# Altium PCB LCD.PcbDoc
Units mil, origin at the board's own origin, x right, y up, seen from the top; angles counter-clockwise.
Board outline 8903 x 4000 mil, 2 copper layers (Top Layer, Bottom Layer); 37 components, 128 nets, 129 pads, 12 vias.
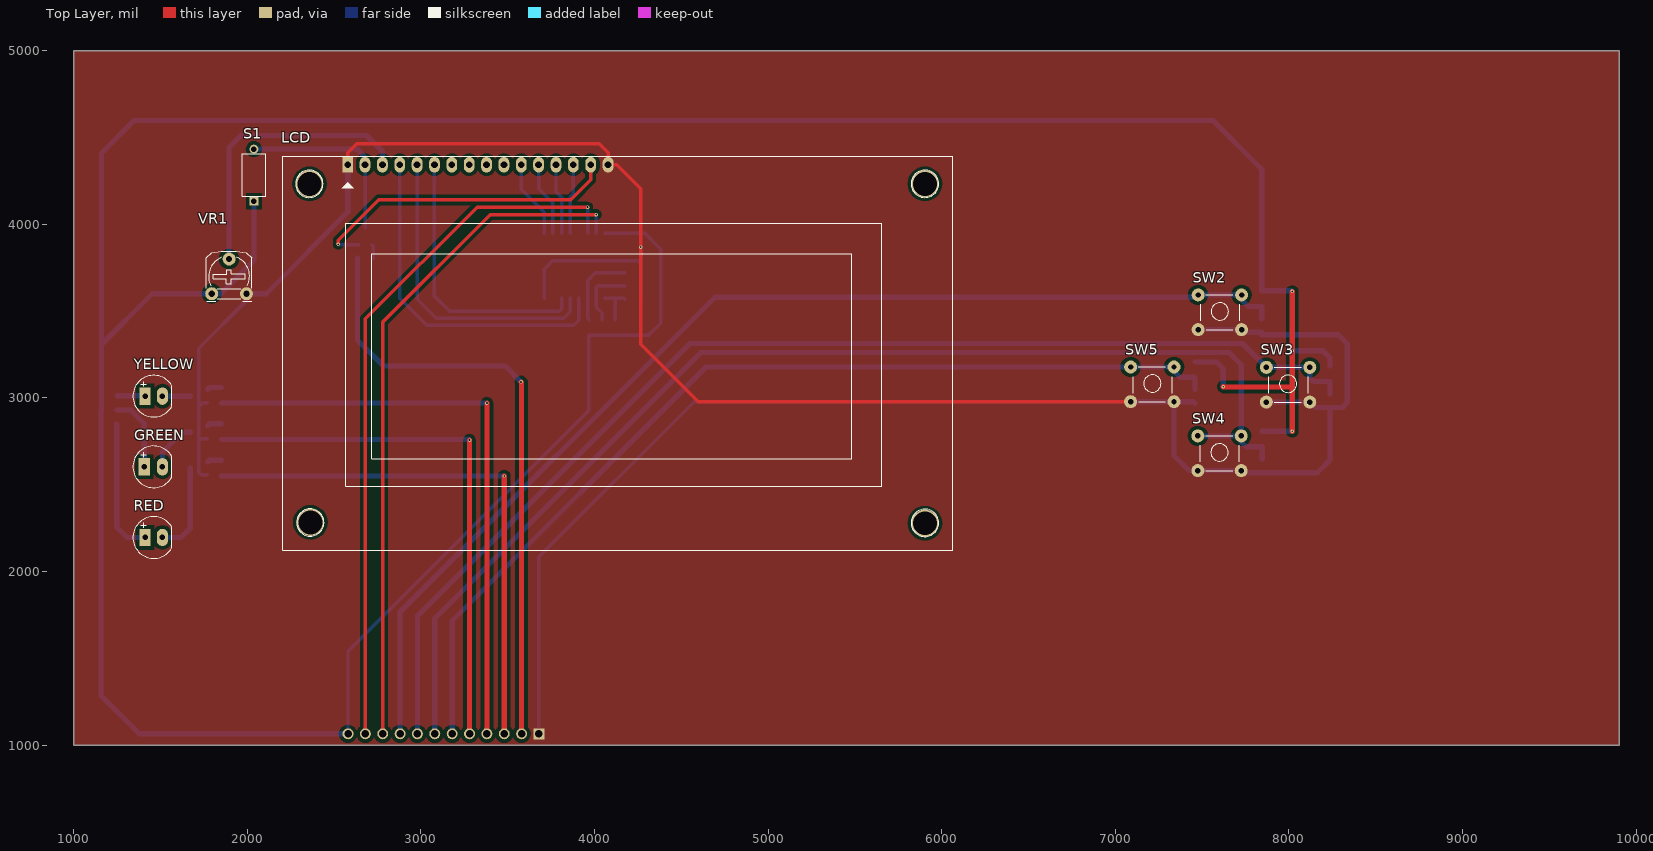
[diagram p0: Top Layer view]
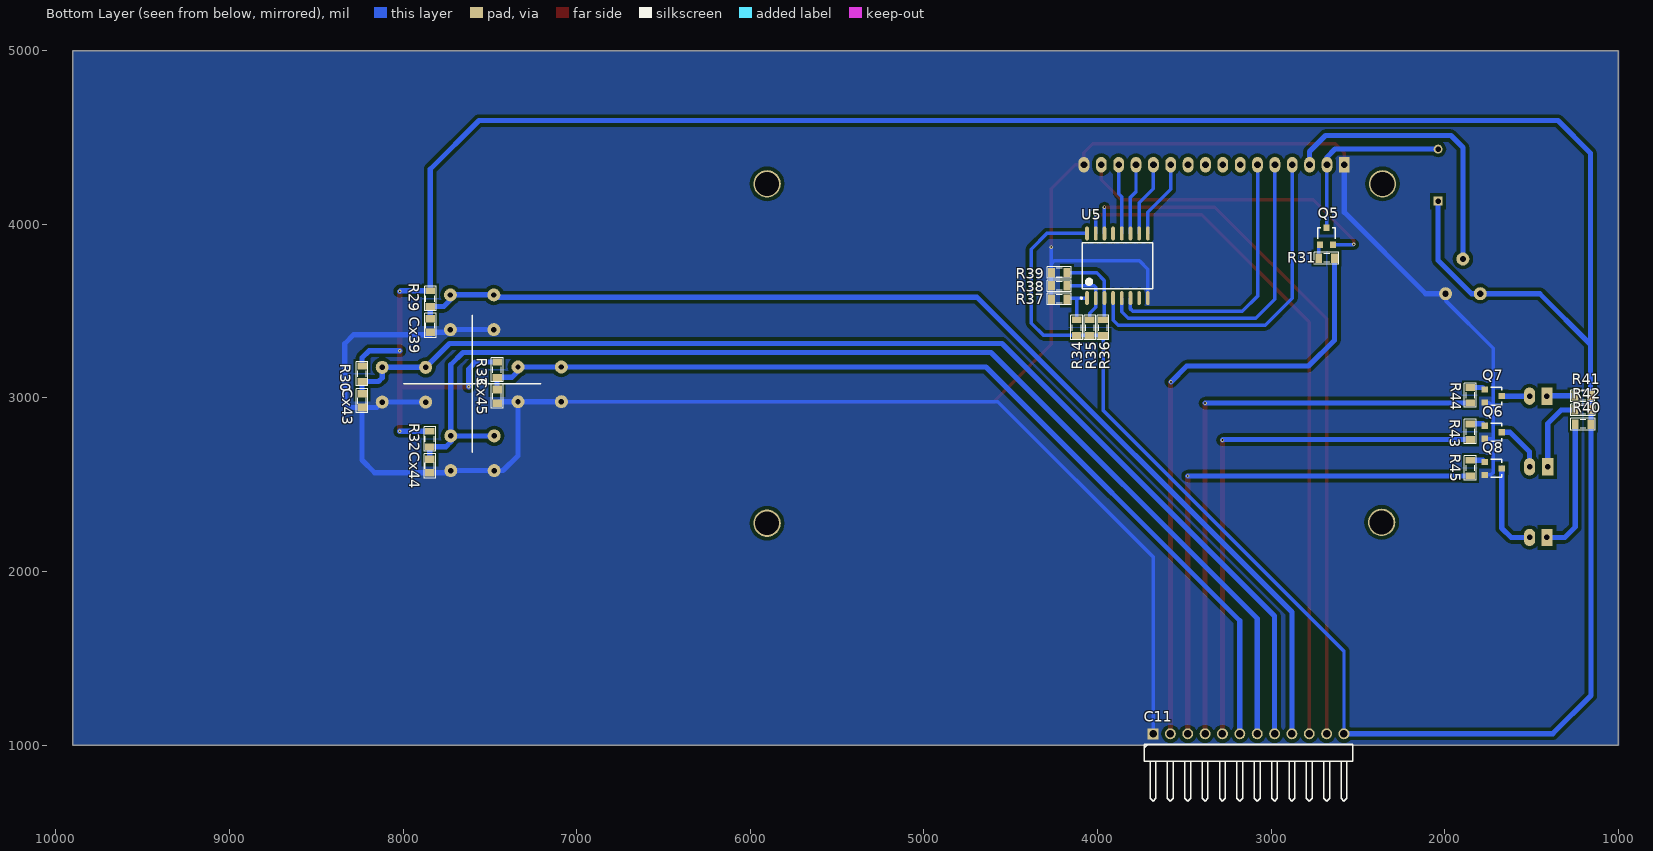
[diagram p1: Bottom Layer view, seen from below]
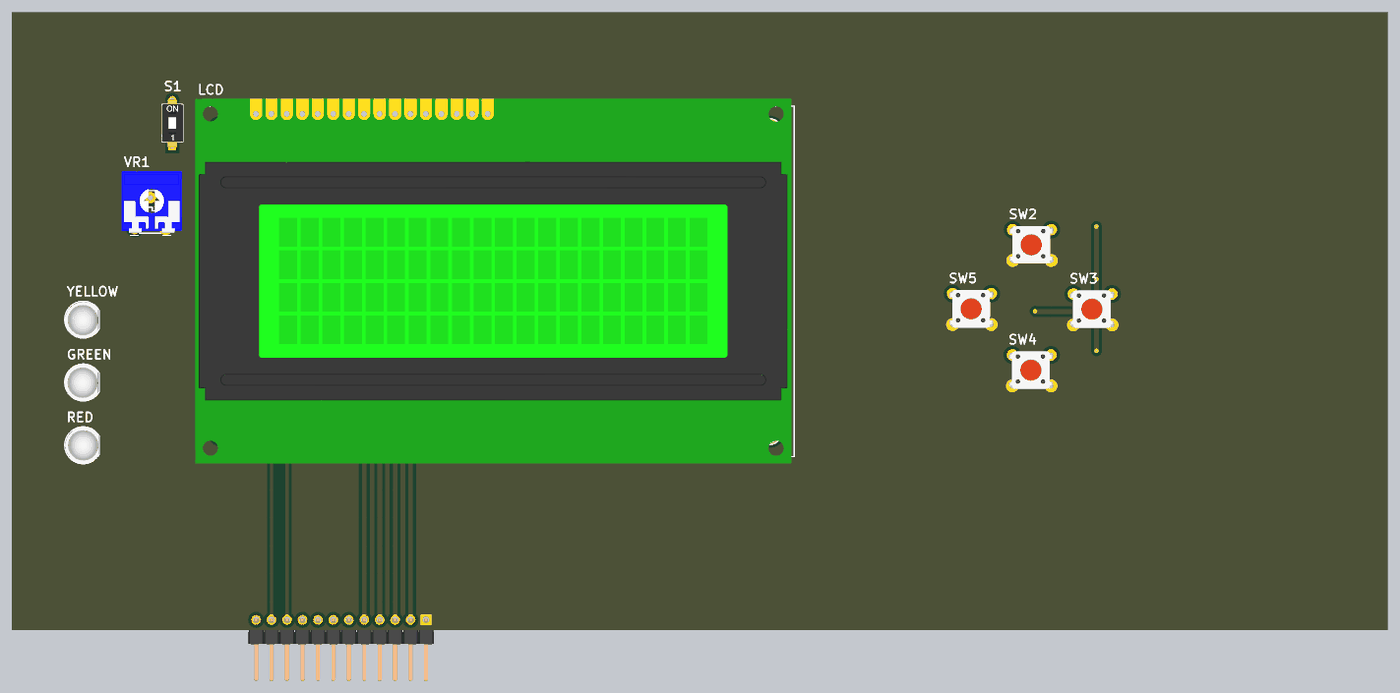
[diagram p2: 3D render of the assembled board from above, using the file's embedded part models]
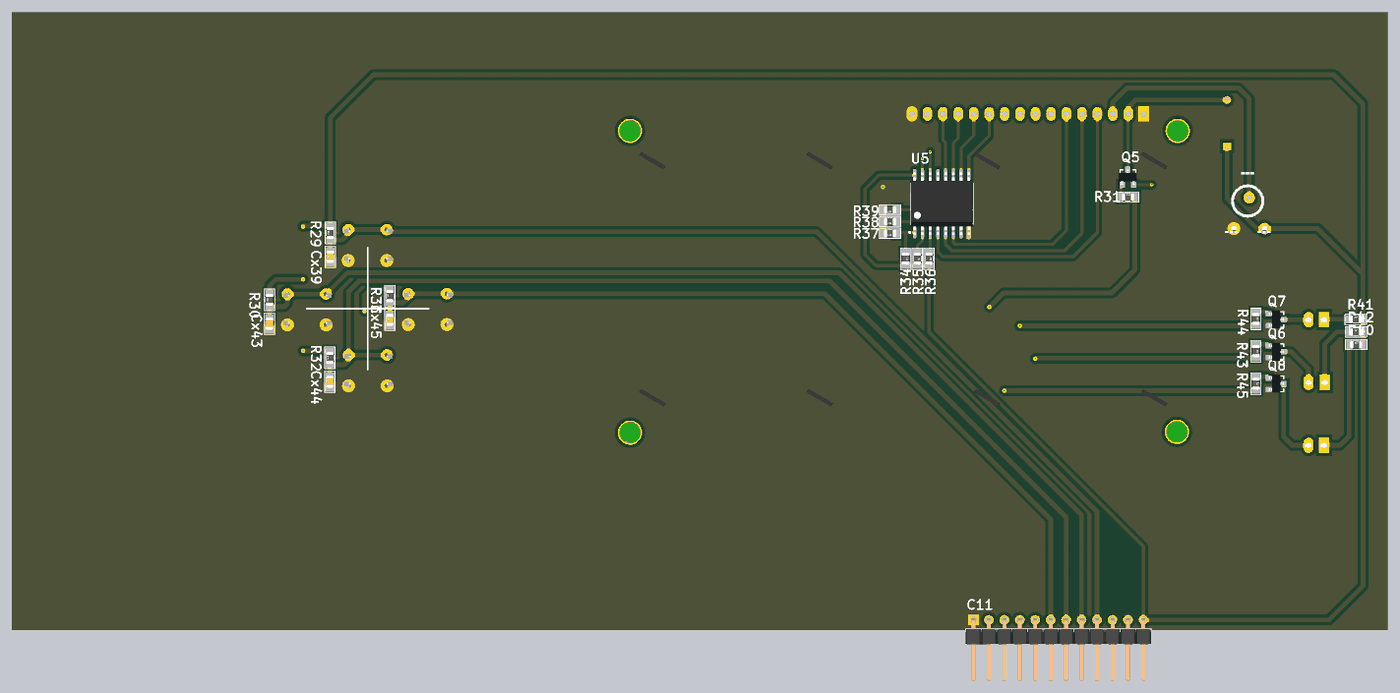
[diagram p3: 3D render of the assembled board from below, using the file's embedded part models]

## Layer stack, top to bottom
Top Solder: solder mask 0.4, Solder Resist, Dk 3.5
Top Layer: signal copper 1.4
Dielectric 1: dielectric 12.6, FR-4, Dk 4.8
Bottom Layer: signal copper 1.4
Bottom Solder: solder mask 0.4, Solder Resist, Dk 3.5

## Board outline
1000,1000 1000,5000 9903,5000 9903,1000

## Design rules (kind name [scope] priority, off if disabled: settings)
Clearance [All] p1: gap=20
PlaneConnect [All] p1: planeconnectstyle=Direct reliefexpansion=20 reliefentries=4 reliefconductorwidth=10 reliefairgap=10
PolygonConnect [All] p1: connectstyle=Direct reliefconductorwidth=10 reliefentries=4 polygonreliefangle="90 Angle" airgapwidth=10
RoutingVias [All] p1: holewidth=28 width=50 viastyle="Through Hole" minholewidth=10 minwidth=20 maxholewidth=28 maxwidth=50
SolderMaskExpansion [All] p1: expansion=4
Width [All] p1: maxlimit=30 minlimit=10 preferedwidth=20
29 further rules are at their usual default settings.

## Components (designator, comment, footprint, x,y, rotation, side; value= is the part's Value field where it differs from the comment)
C11 "JP12" JP12-D1C 2530,965 r180 bottom
Cx39 "104" CN-SMD-0805 7843,3416.93 r90 bottom
Cx43 "104" CN-SMD-0805 8236,2983.93 r90 bottom
Cx44 "104" CN-SMD-0805 7846,2607.93 r90 bottom
Cx45 "104" CN-SMD-0805 7458,3008.93 r90 bottom
GREEN "LED" LED-5-Green 1411,2603 r0 top
LCD "LCD 20x4A" LCD20X4A 2578,4343 r0 top
Q5 "2SC1815" SOT23-321 2680.11,3932 r180 bottom
Q6 "2SC1815" SOT23-321 1721,2802.12 r270 bottom
Q7 "2SC1815" SOT23-321 1721,3010.12 r270 bottom
Q8 "2SC1815" SOT23-321 1721,2594.12 r270 bottom
R29 "10k" RES-SMD-0805 7843,3571.93 r90 bottom
R30 "10k" RES-SMD-0805 8236,3138.93 r90 bottom
R31 "1k" RES-SMD-0805 2680,3805 r180 bottom
R32 "10k" RES-SMD-0805 7846,2762.93 r90 bottom
R33 "10k" RES-SMD-0805 7458,3161.93 r90 bottom
R34 "10k" RES-SMD-0805 4119,3405 r270 bottom
R35 "10k" RES-SMD-0805 4043.5,3405 r270 bottom
R36 "10k" RES-SMD-0805 3968,3405 r270 bottom
R37 "10k" RES-SMD-0805 4220,3569 r0 bottom
R38 "10k" RES-SMD-0805 4220,3645 r0 bottom
R39 "10k" RES-SMD-0805 4220,3721 r0 bottom
R40 "1k" RES-SMD-0805 1203,2849 r180 bottom
R41 "1k" RES-SMD-0805 1205,3012 r180 bottom
R42 "1k" RES-SMD-0805 1204,2930.5 r180 bottom
R43 "10k" RES-SMD-0805 1852,2805.5 r270 bottom
R44 "10k" RES-SMD-0805 1852,3015 r270 bottom
R45 "10k" RES-SMD-0805 1852,2596 r270 bottom
RED "LED" LED-5-RED 1411,2196 r0 top
S1 "partNo" SW-DIP1 2038,4283 r0 top
SW2 "SW" SW2-DIP 7477,3592.93 r0 top
SW3 "SW" SW2-DIP 7870,3175.93 r0 top
SW4 "SW" SW2-DIP 7475,2780.93 r0 top
SW5 "SW" SW2-DIP 7088,3177.93 r0 top
U5 "PCF8574" SO16L 3885,3761 r90 bottom
VR1 "50K" VR-S2 1795,3600 r0 top
YELLOW "LED" LED-5-Yellow 1411,3010 r0 top

## Footprints (in the part's own frame and the unit in brackets; to place one, negate y for a bottom-side part, rotate by r counter-clockwise, add the part's x,y. Pads: shape width x height; smd on the part's side, far side on the other; paste and mask are expansions set on the pad)
CN-SMD-0805 [mil]
  rect 43.31x55 smd: 1(-39.36,0.01) 2(39.37,0.01)
  silkscreen extent -70,-34 70,33, body extent -39,-25 39,25, height 31
JP12-D1C [mm] "12 pins, 1 row, right angled, gold plating"
  rect 1.6x1.6 hole 1.1: 1(-29.21,2.54)
  round 1.6 hole 1.1: 2(-26.67,2.54) 3(-24.13,2.54) 4(-21.59,2.54) 5(-19.05,2.54) 6(-16.51,2.54) 7(-13.97,2.54) 8(-11.43,2.54) 9(-8.89,2.54) 10(-6.35,2.54) 11(-3.81,2.54) 12(-1.27,2.54)
  silkscreen extent -30.48,-7.34 0,1.04, body extent -30.48,-7.52 0,2.84, height 2.55
LCD20X4A [mil] "LCD dipslay 20x4, 16 pin"
  rect 62x90 hole 39: 1(0,0)
  oval 62x90 hole 39: 2(100,0) 3(200,0) 4(300,0) 5(400,0) 6(500,0) 7(600,0) 8(700,0) 9(800,0) 10(900,0) 11(1000,0) 12(1100,0) 13(1200,0) 14(1300,0) 15(1400,0) 16(1500,0)
  round 157.48 hole 137.8: "Hole 0"(-220,-110) "Hole 0"(-215,-2060) "Hole 0"(3325,-2065) "Hole 0"(3325,-110)
  silkscreen extent -375,-2220 3485,50, body extent -392,-2264 3466,98, height 417
LED-5-Green [mil] "LED 2 PIN, 5 ly , Only colour,pin to pin 100mil"
  rect 65x100 hole 32: 1(-5,0)
  oval 65x100 hole 32: 2(100,0)
  silkscreen extent -70,-120 154,120, body extent -69,-120 145,117, height 339
LED-5-RED [mil] "LED 2 PIN, 5 ly , Only colour,pin to pin 100mil"
  rect 65x100 hole 32: 1(0,0)
  oval 65x100 hole 32: 2(100,0)
  silkscreen extent -70,-120 154,120, body extent -65,-119 149,118, height 339
LED-5-Yellow [mil] "LED 2 PIN, 5 ly , Only colour,pin to pin 100mil"
  rect 65x100 hole 32: 1(0,0)
  oval 65x100 hole 32: 2(100,0)
  silkscreen extent -70,-120 154,120, body extent -67,-122 147,115, height 339
RES-SMD-0805 [mil]
  rect 39.37x55 smd: 1(-45,0) 2(45,0)
  silkscreen extent -70,-34 70,33, body extent -39,-25 39,25, height 31
SO16L [mm] "SOIC, 16-Leads, Body 10.30x7.50mm, Pitch 1.27mm, IPC Medium Density"
  oval 2.032x0.55 smd: 1(-4.725,4.445) 2(-4.725,3.175) 3(-4.725,1.905) 4(-4.725,0.635) 5(-4.725,-0.635) 6(-4.725,-1.905) 7(-4.725,-3.175) 8(-4.725,-4.445) 9(4.725,-4.445) 10(4.725,-3.175) 11(4.725,-1.905) 12(4.725,-0.635) 13(4.725,0.635) 14(4.725,1.905) 15(4.725,3.175) 16(4.725,4.445)
  silkscreen extent -4.85,-5.15 3.35,5.4, body extent -5.15,-5.17 5.16,5.16, height 2.48
SOT23-321 [mm]
  rect 0.9x0.95 smd mask+0: 1(0.95,-1.25)
  rect 0.9x0.95 smd: 2(0,1.25) 3(-0.95,-1.25)
  silkscreen extent -1.3,-0.38 1.3,1.25, body extent -1.52,-1.23 1.48,1.27, height 1.06
SW2-DIP [mil] "SW button 4pin, 250 x250 mil"
  round 75 hole 31: 1(0,0) 2(0,-200) 3(250,-200) 4(250,0)
  silkscreen extent 15,-215 240,0, body extent -36,-220 276,24, height 276
SW-DIP1 [mm]
  rect 1.3x1.3 hole 0.8: 1(0,-3.81)
  round 1.3 hole 0.8: 2(0,3.81)
  silkscreen extent -1.74,-3.1 1.74,3.1, body extent -1.74,-3.98 1.74,3.89, height 3.95
VR-S2 [mil] "Resistor Variable"
  round 75 hole 35: 1(0,0) 2(100,200) 3(200,0)
  silkscreen extent -31,-44 231,246, body extent -87,-30 307,372, height 165

## Part data
C11: "WR-PHD 2.54 mm Angled Socket Header"
Cx39 Cx43 Cx44 Cx45: library part CN
GREEN RED YELLOW: "LED Single colour Green and Red"
LCD: library part LCD20x4A, "LCD dipslay 20 char, 4 line"
Q5 Q6 Q7 Q8: "NPN 600mW, ECB"
R29 R30 R31 R32 R33 R34 R35 R36 R37 R38 R39 R40 R41 R42 R43 R44 R45: library part Res-SMD, "Resistor"
S1: library part SWDIP1, "WS-DITV 2.54 mm small compact THT flat actuator with top tape"
SW2 SW3 SW4 SW5: library part SW4, "Switch button 4 pin"
U5: "I2C PORT EXPANDER"
VR1: library part VR-S, "Var Resistor"

## Via types
v1: diameter 20, hole 10, Top Layer to Bottom Layer, 12 vias

## Nets (pads, with @x,y where several pads share a name; then routed paths per layer and width w, separated by ;. In a path a pad name is that pad's centre, name@x,y a point inside that pad or via, vN(x,y) a via of type N, cw(c..) or ccw(c..) an arc to the next point about the centre after c; other vN are vias at no path point)
3V3: 
5V: 
A0: R34.1 R37.1 U5.1 | length 242.9
  Bottom Layer w20: U5.1 4120,3574.98 ; R34.1 4119,3573.98 4120,3574.98 ; R37.1 4169.02,3574.98 4120,3574.98
A1: R35.1 R38.1 U5.2 | length 369.2
  Bottom Layer w20: R35.1 4043.5,3488.5 4010,3522 U5.2 4010,3637 4018,3645 R38.1
A2: R36.1 R39.1 U5.3 | length 463
  Bottom Layer w20: R36.1 3960,3458 U5.3 3960,3676 4005,3721 R39.1
ASC1: 
ASC2: 
ASC3: 
ASC4: 
ASC5: 
ASC6: 
ASC7: 
ASC8: 
ASC9: 
ASC10: 
BUZZ: 
GND: C11.1 Cx39.1 Cx43.1 Cx44.1 Cx45.1 LCD.1 LCD.16 Q6.1 Q7.1 Q8.1 R37.2 R38.2 R39.2 SW2.2 SW2.3 SW3.2 SW3.3 SW4.2 SW4.3 SW5.2 SW5.3 U5.8 VR1.3 | length 17684.1
  Top Layer w20: LCD.1 2578,4411 2630,4463 4028,4463 4078,4413 LCD.16 4127,4343 4266,4204 v1(4266,3869) 4266,3310 4598.07,2977.93 SW5.2
  Bottom Layer w20: Q8.1 1734.29,2556.71 1721,2570 1721,2765 ; Q6.1 1721.29,2764.71 1721,2765 ; Q7.1 1744.71,2972.71 1721,2949 ; VR1.3 1995,3561 1721,3287 1721,2949 ; C11.1 3680,2084 4573.93,2977.93 SW5.2 ; U5.8 3710,3741 3758,3789 4248,3789 4267,3770 ; R37.2 R38.2 R39.2 4267,3723 4267,3770 ; v1(4266,3869) 4267,3868 4267,3770 ; 1721,2765 1721,2949
  Bottom Layer w30: VR1.3 2109,3600 2578,4069 LCD.1 ; SW5.2 SW5.3 ; Cx45.1 7449.64,2977.93 SW5.3 ; SW2.2@7477,3393.93 SW2.3@7727,3393.93 ; SW2.3@7716,3382.93 SW2.3@7727,3393.93 ; Cx39.1@7843.01,3363.56 8284.44,3363.56 8336,3312 8336,2973 8307.56,2944.56 Cx43.1 ; Cx39.1 7743.36,3377.56 SW2.3@7727,3393.93 ; SW3.2@7863.64,2969.56 SW3.2 SW3.3 8151.36,2944.56 Cx43.1 ; SW5.3 7338,2667 7424.07,2580.93 SW4.2 SW4.3 7737.36,2568.56 Cx44.1 8162.56,2568.56 8236.01,2642.01 Cx43.1
LED_B: 
LED_G: 
LED_R: 
MISO: 
MOSI: 
Net1N4117_1: 
Net1N5822_2: 
NetBT1_1: 
NetC1_4: C11.9 Cx39.2 R29.1 SW2.1 SW2.4 | length 6530.7
  Bottom Layer w30: C11.9 2880,1766 4693.93,3579.93 SW2.1@7477,3579.93 ; SW2.1@7477,3593.93 7727,3593.93 SW2.4 7727,3565 7765.07,3526.93 R29.1 Cx39.2
NetC1_5: C11.8 Cx43.2 R30.1 SW3.1 SW3.4 | length 6782.2
  Bottom Layer w30: C11.8 2980,1744 4550,3314 7731.93,3314 SW3.1 SW3.4 8120,3116 8142.07,3093.93 R30.1 Cx43.2
NetC1_6: C11.7 Cx44.2 R32.1 SW4.1 SW4.4 | length 6870.7
  Bottom Layer w30: C11.7 3080,1729 4612.61,3261.61 7654.39,3261.61 7725,3191 SW4.4 ; SW4.1 SW4.4 ; Cx44.2 R32.1 ; R32.1 7754.07,2717.93 7725,2747 SW4.4
NetC1_7: C11.6 Cx45.2 R33.1 SW5.1 SW5.4 | length 5644.2
  Bottom Layer w30: C11.6 3180,1716 4641.93,3177.93 SW5.1 SW5.4 7338,3153 7372.07,3118.93 R33.1@7458,3118.93 ; Cx45.2 R33.1@7458.01,3118.92
NetC1_8: C11.5 R43.2 | length 3121.5
  Top Layer w30: C11.5 v1(3280,2757)
  Bottom Layer w30: R43.2 3276.5,2760.5 v1(3280,2757)
NetC1_9: C11.4 R44.2 | length 3433
  Top Layer w30: C11.4 v1(3380,2970)
  Bottom Layer w30: R44.2 v1(3380,2970)
NetC1_10: C11.3 R45.2 | length 3113.4
  Top Layer w30: C11.3 v1(3480,2550)
  Bottom Layer w30: R45.2 1853,2550 v1(3480,2550)
NetC1_11: C11.2 R31.2 | length 3542.7
  Top Layer w30: v1(3577,3092) 3580,3089 C11.2
  Bottom Layer w30: R31.2 2635,3332 2784,3183 3486,3183 v1(3577,3092)
NetC7_1: 
NetCx3_2: 
NetCx4_2: 
NetCx8_2: 
NetCx9_2: 
NetCx12_2: 
NetCx15_2: 
NetCx18_2: 
NetCx21_2: 
NetCx24_2: 
NetCx27_2: 
NetCx30_2: 
NetCx33_2: 
NetCx36_2: 
NetCx41_2: 
NetDIO2_1: 
NetGREEN_1: GREEN.1 R42.1 | length 439.1
  Bottom Layer w30: R42.1 1328.5,2930.5 1406,2853 GREEN.1
NetGREEN_2: GREEN.2 Q6.2 | length 294.2
  Bottom Layer w30: GREEN.2 1511,2690 1623.12,2802.12 Q6.2
NetIC1_2: 
NetIC1_3: 
NetIC1_5: 
NetIC1_6: 
NetIC1_8: 
NetIC1_9: 
NetIC1_12: 
NetIC2_1: 
NetIC2_2: 
NetIC3_1: 
NetIC4_1: 
NetIC5_1: 
NetIC6_1: 
NetIC7_1: 
NetIC8_1: 
NetIC9_1: 
NetIC10_1: 
NetIC11_1: 
NetIC12_1: 
NetLCD_3: LCD.3 VR1.2 | length 1668.3
  Bottom Layer w30: VR1.2 1895,4442 1964,4511 2687,4511 2778,4420 LCD.3
NetLCD_4: LCD.4 U5.4 | length 2005.6
  Bottom Layer w20: LCD.4 2878,3573 3033,3418 3880,3418 3910,3448 U5.4
NetLCD_5: LCD.5 U5.5 | length 1796.7
  Bottom Layer w20: LCD.5 2978,3569 3089,3458 3822,3458 3860,3496 U5.5
NetLCD_6: LCD.6 U5.6 | length 1594.2
  Bottom Layer w20: LCD.6 3078,3586 3166,3498 3796,3498 3810,3512 U5.6
NetLCD_11: LCD.11 U5.9 | length 450.7
  Bottom Layer w20: LCD.11 3578,4201 3710,4069 U5.9
NetLCD_12: LCD.12 U5.10 | length 429.9
  Bottom Layer w20: LCD.12 3678,4205 3760,4123 U5.10
NetLCD_13: LCD.13 U5.11 | length 409.2
  Bottom Layer w20: LCD.13 3778,4187 3810,4155 U5.11
NetLCD_14: LCD.14 U5.12 | length 403.4
  Bottom Layer w20: U5.12 3860,4158 3878,4176 LCD.14
NetLCD_15: LCD.15 Q5.1 | length 1827.8
  Top Layer w20: v1(2524,3884) 2524,3908 2757,4141 3862,4141 3978,4257 LCD.15
  Bottom Layer w20: v1(2524,3884) 2525.21,3882.79 Q5.1
NetLED1_1: 
NetLED1_4: 
NetLED1_5: 
NetLED1_6: 
NetLED2_1: 
NetLS1_1: 
NetQ1_3: 
NetQ2_3: 
NetQ3_3: 
NetQ4_3: 
NetQ5_3: Q5.3 R31.1 | length 80.9
  Bottom Layer w20: Q5.3 2725,3875.3 R31.1
NetQ6_3: Q6.3 R43.1 | length 86.3
  Bottom Layer w30: Q6.3 1781.2,2850.5 R43.1
NetQ7_2: Q7.2 YELLOW.2 | length 160.8
  Bottom Layer w30: YELLOW.2 1671.67,3010 Q7.2
NetQ7_3: Q7.3 R44.1 | length 87
  Bottom Layer w30: Q7.3 1782.7,3060 R44.1
NetQ8_2: Q8.2 RED.2 | length 526.8
  Bottom Layer w30: RED.2 1617,2196 1671.79,2250.79 Q8.2
NetQ8_3: Q8.3 R45.1 | length 85.7
  Bottom Layer w30: Q8.3 1779.7,2641 R45.1
NetR2_1: 
NetR9_2: 
NetR10_2: 
NetR11_2: 
NetR12_2: 
NetR14_2: 
NetR15_2: 
NetR18_2: 
NetR19_2: 
NetR21_2: 
NetR22_2: 
NetR28_2: 
NetR40_1: R40.1 RED.1 | length 780.9
  Bottom Layer w30: R40.1 1248,2256 1308,2196 RED.1
NetR41_1: R41.1 YELLOW.1 | length 161.8
  Bottom Layer w30: R41.1 1409,3012 YELLOW.1
NetU1_71: 
NetU1_72: 
NetU1_73: 
NetU1_74: 
NTC1: 
NTC2: 
RESET: 
RXD0: 
RXD1: 
SCK: 
SCL: C11.11 U5.14 | length 4088.7
  Top Layer w20: C11.11 2680,3455 3324,4099 v1(3960,4099)
  Bottom Layer w10: v1@3960,4096 v1(3960,4099)
  Bottom Layer w20: U5.14 v1@3960,4096
SDA: C11.10 U5.15 | length 3967.4
  Top Layer w20: C11.10 2780,3437 3399,4056 v1(4010,4056)
  Bottom Layer w20: U5.15 v1(4010,4056)
SS: 
TXD0: 
TXD1: 
VCC: C11.12 R29.2 R30.2 R32.2 R33.2 R34.2 R35.2 R36.2 R40.2 R41.2 R42.2 S1.1 U5.16 VR1.1 | length 19850.1
  Top Layer w30: v1(7622,3064) 7624,3062 8019,3062 ; v1(8019,2808) 8019,3062 ; v1(8019,3613) v1(8019,3271) 8019,3062
  Bottom Layer w20: C11.12 2580,1541 3968,2929 R36.2 R35.2 R34.2 4311,3360 4382,3431 4382,3857 4291.98,3947.02 U5.16
  Bottom Layer w30: S1.1 2038,3793 1845,3600 VR1.1 1452,3600 1160,3308 ; C11.12 1378,1065 1158,1285 R40.2 1158,2929.5 R42.2 1160,2931.5 R41.2 1160,3308 ; R33.2 7582.07,3206.93 7622,3167 v1(7622,3064) ; R32.2 8018.93,2807.93 v1(8019,2808) ; v1(8019,3271) 8196,3271 8236,3231 R30.2 ; v1(8019,3613) 8015.07,3616.93 R29.2 7843,4317 7563,4597 1348,4597 1160,4409 1160,3308
VDD_LCD: LCD.2 Q5.2 S1.2 | length 1065.1
  Bottom Layer w20: LCD.2 2680.11,4340.89 Q5.2
  Bottom Layer w30: S1.2 2631,4433 2678,4386 LCD.2
VIN: 
VIN_1: 
pads on no net: "LCD.Hole 0" LCD.7 LCD.8 LCD.9 LCD.10 U5.7 U5.13

## Polygon pours and split planes (outlines as drawn)
GND on Top Layer "Top Layer-No Net" (solid, remove dead copper, pour order 0): 1000,5000 9903,5000 9903,1000 1000,1000
GND on Bottom Layer "Top Layer-No Net" (solid, remove dead copper, pour order 4): 994,5000 9903,5000 9903,1000 994,1000

## Silkscreen, mask and mechanical layers (free items; w line width, h text height)
Bottom Overlay:
  lines w10: 7207.3,3081.13 7994.7,3081.13 ; 7601,2687.43 7601,3474.83
Mechanical 1:
  the board outline again, w47.24